# Altium PCB tPenAscii.PcbDoc
Units mm, origin at the board's own origin, x right, y up, seen from the top; angles counter-clockwise.
Board outline 48.77 x 80.39 mm, 2 copper layers (Top Layer, Bottom Layer); 69 components, 62 nets, 275 pads, 270 vias.
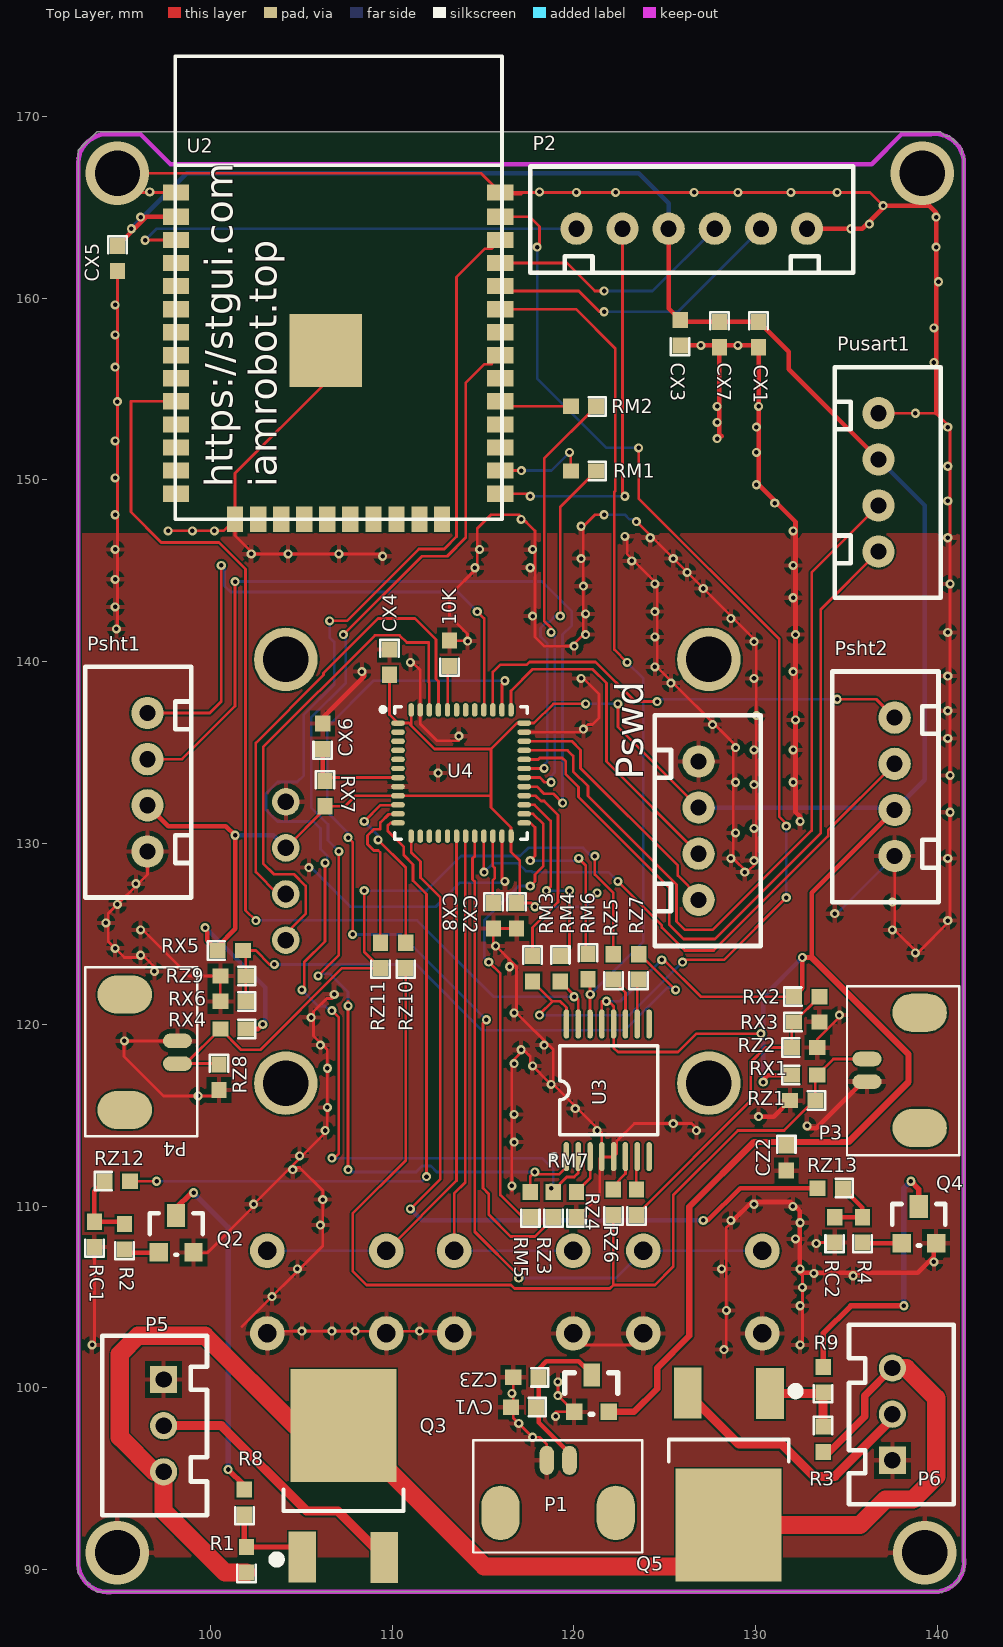
[diagram p0: Top Layer view]
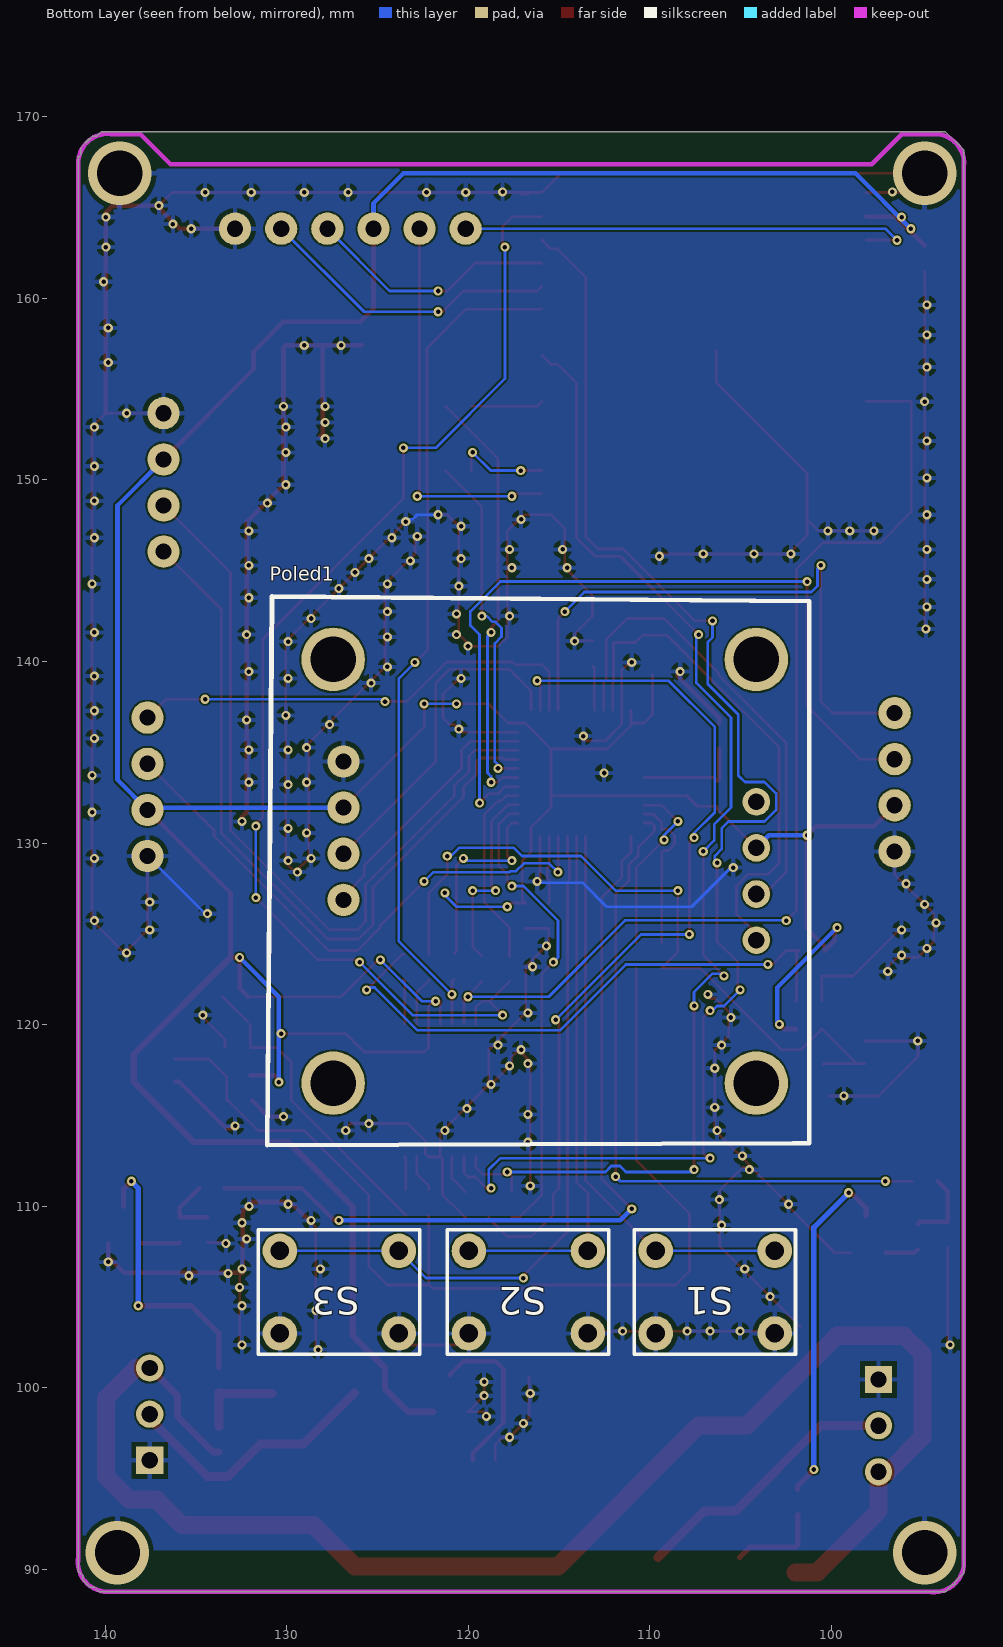
[diagram p1: Bottom Layer view, seen from below]

## Layer stack, top to bottom
Top Layer: signal copper 0.0356
Dielectric: dielectric 0.32, FR-4, Dk 4.8
Bottom Layer: signal copper 0.0356

## Board outline
92.71,90.297 92.71,168.021 92.71,168.148 93.726,169.164 95.25,169.164 140.208,169.164 140.335,169.037 140.462,168.91 140.589,168.91 140.716,168.91 140.843,168.783 141.351,168.275 141.351,168.021 141.351,167.894 141.478,167.767 141.478,90.424 141.478,89.916 141.351,89.789 141.224,89.662 141.224,89.408 140.843,89.027 140.589,89.027 140.335,88.773 135.509,88.773 94.107,88.773 93.726,88.773 93.599,88.9 93.345,89.154 93.218,89.154 93.218,89.281 92.964,89.535 92.71,89.789 92.71,90.297

## Design rules (kind name [scope] priority, off if disabled: settings)
Clearance [All] p1: gap=0.1
HoleToHoleClearance [All] p1: gap=0 allowstackedmicrovias=TRUE
MinimumSolderMaskSliver [All] p1: minsoldermaskwidth=0
PolygonConnect [All] p1: connectstyle=Relief reliefconductorwidth=0.254 reliefentries=4 polygonreliefangle="90 Angle" airgapwidth=0.254
RoutingVias [All] p1: holewidth=0.711 width=1.27 viastyle="Through Hole" minholewidth=0.711 minwidth=1.27 maxholewidth=0.711 maxwidth=1.27
SilkToSilkClearance [All] p1: silktosilkclearance=0
SilkToSolderMaskClearance [IsPad] p1: minsilkscreentomaskgap=0 clearancetoexposedcopper=TRUE
SolderMaskExpansion [All] p1: expansion=0.05
Width [All] p1: maxlimit=3 minlimit=0.1 preferedwidth=0.154 minimp=50.000000 maximp=50.000000 favimp=50.000000
24 further rules are at their usual default settings.

## Components (designator, comment, footprint, x,y, rotation, side; value= is the part's Value field where it differs from the comment)
1 "662K" SOT23-3-1 120.015,98.679 r0 top
10K "100" 0603 113.157,140.462 r90 top
CV1 "10uF" 0603 117.221,98.933 r180 top
CX1 "100NF" 0603 130.175,157.988 r270 top
CX2 "100NF" 0603 116.84,125.984 r270 top
CX3 "100NF" 0603 125.857,158.115 r90 top
CX4 "100NF" 0603 109.855,139.954 r270 top
CX5 "100NF" 0603 94.869,162.179 r270 top
CX6 "100NF" 0603 106.172,135.89 r90 top
CX7 "100NF" 0603 128.016,157.988 r270 top
CX8 "2.2UF" 0603 115.57,125.984 r270 top
CZ2 "105" 0603 131.699,112.649 r270 top
CZ3 "105" 0603 117.348,100.584 r180 top
P1 "1.25-2P" 1.25����-��ʽͨ��-2P 119.761,96.012 r180 top
P2 "插件座" B6B-XH-A 120.142,163.83 r0 top
P3 "1.25-2P" 1.25����-��ʽͨ��-2P 136.144,118.11 r270 top
P4 "1.25-2P" 1.25����-��ʽͨ��-2P 98.171,117.856 r90 top
P5 "3P接线端子" XH2.54-3 97.409,100.457 r270 top
P6 "3P接线端子" XH2.54-3 137.541,96.012 r90 top
Poled1 "插件座" 0.96OLED 114.554,126.746 r270 bottom
Psht1 "插件座" B4B-XH-A 96.52,129.54 r90 top
Psht2 "插件座" B4B-XH-A 137.668,129.286 r90 top
Pswd "插件座" B4B-XH-A 126.873,134.493 r270 top
Pusart1 "插件座" B4B-XH-A 136.779,153.67 r270 top
Q2 "NPN" SOT23 97.028,107.442 r0 top
Q3 "Pmos NTD25P03LG" TO252 107.315,93.726 r0 top
Q4 "NPN" SOT23 137.922,107.95 r0 top
Q5 "Pmos NTD25P03LG" TO252 128.524,96.647 r180 top
R1 "3K" 0603 101.981,90.551 r90 top
R2 "1K" 0603 95.25,108.331 r90 top
R3 "3K" 0603 133.731,97.155 r270 top
R4 "1K" 0603 135.89,108.712 r90 top
R8 "3K" 0603 101.854,93.726 r90 top
R9 "3K" 0603 133.731,100.457 r90 top
RC1 "10K" 0603 93.599,108.458 r90 top
RC2 "10K" 0603 134.366,108.712 r90 top
RM1 "100" 0603 120.523,150.495 r180 top
RM2 "100" 0603 120.523,154.051 r180 top
RM3 "100" 0603 117.729,123.063 r270 top
RM4 "100" 0603 119.253,123.063 r270 top
RM5 "100" 0603 117.602,110.109 r90 top
RM6 "100" 0603 120.777,123.19 r270 top
RM7 "100" 0603 118.872,110.109 r90 top
RX1 "6.8K" 0603 132.715,117.221 r0 top
RX2 "6.8K" 0603 132.842,121.539 r0 top
RX3 "330" 0603 132.842,120.142 r0 top
RX4 "6.8K" 0603 101.219,119.761 r180 top
RX5 "6.8K" 0603 101.092,124.079 r0 top
RX6 "330" 0603 101.219,121.285 r180 top
RX7 "10K" 0603 106.299,132.715 r270 top
RZ1 "10K" 0603 132.588,115.824 r180 top
RZ2 "10K" 0603 132.715,118.745 r0 top
RZ3 "10K" 0603 120.142,110.109 r90 top
RZ4 "1K" 0603 122.174,110.236 r90 top
RZ5 "1K" 0603 122.174,123.19 r90 top
RZ6 "1K" 0603 123.444,110.236 r90 top
RZ7 "1K" 0603 123.571,123.19 r90 top
RZ8 "10K" 0603 100.457,117.094 r270 top
RZ9 "10K" 0603 101.219,122.682 r180 top
RZ10 "1K" 0603 110.744,123.825 r90 top
RZ11 "1K" 0603 109.347,123.825 r90 top
RZ12 "1K" 0603 94.869,111.379 r0 top
RZ13 "1K" 0603 134.112,110.998 r180 top
S1 "开关" ��λ���� 105.41,105.537 r0 bottom
S2 "开关" ��λ���� 115.697,105.537 r0 bottom
S3 "开关" ��λ���� 126.111,105.537 r0 bottom
U2 "esp-wroom-32" ESP32 102.108,151.638 r0 top
U3 "ADS1220" SSOP16 123.317,116.586 r90 top
U4 "STM32F401CC" STM32F401CC-UFQFPN48 113.792,133.858 r0 top

## Footprints (in the part's own frame and the unit in brackets; to place one, negate y for a bottom-side part, rotate by r counter-clockwise, add the part's x,y. Pads: shape width x height; smd on the part's side, far side on the other; paste and mask are expansions set on the pad)
0.96OLED [mil]
  round 137.8 hole 98.43 mask+4: 01(-526.26,410) 02(392.4,410) 03(392.4,-507.32) 04(-526.26,-507.32)
  round 60 hole 36 mask+4: 1(-217.6,410) 2(-117.6,410) 3(-17.6,410) 4(82.4,410)
  silkscreen extent -663,-650 527,525
1.25����-��ʽͨ��-2P [mm]
  oval 2.1x3 smd: 0(-2.55,2.9) 0(3.8,2.9)
  oval 0.8x1.6 smd: 1(0,0) 2(1.25,0)
  round 1.524 on Top Overlay: 10(-2.096,0.066)
  silkscreen extent -4,-1.1 5.3,5.08
0603 [mil]
  rect 35x33 smd: 1(-28,0) 2(27,0)
  silkscreen extent -49,-20 -12,20
B4B-XH-A [mil]
  round 70 hole 35: 1(0,0) 2(100,0) 3(200,0) 4(300,0)
  silkscreen extent -100,-95 400,135, body extent -94,-93 394,134, height 276
B6B-XH-A [mil]
  round 70 hole 35: 1(0,0) 2(100,0) 3(200,0) 4(300,0) 5(400,0) 6(500,0)
  silkscreen extent -100,-95 600,135, body extent -93,-93 593,134, height 276
ESP32 [mil]
  rect 57x35.43 smd: 1(-158,558.66) 2(-158,505.72) 3(-158,455.72) 4(-158,405.72) 5(-158,355.72) 6(-158,305.72) 7(-158,255.72) 8(-158,205.72) 9(-158,155.72) 10(-158,105.72) 11(-158,55.72) 12(-158,5.72) 13(-158,-44.28) 14(-158,-94.28) 25(545,-94.28) 26(545,-44.28) 27(545,5.72) 28(545,55.72) 29(545,105.72) 30(545,155.72) 31(545,205.72) 32(545,255.72) 33(545,305.72) 34(545,355.72) 35(545,405.72) 36(545,455.72) 37(545,505.72) 38(545,558.66)
  rect 35.43x55 smd: 15(-30.08,-150) 16(19.92,-150) 17(69.92,-150) 18(119.92,-150) 19(169.92,-150) 20(219.92,-150) 21(269.92,-150) 22(319.92,-150) 23(369.92,-150) 24(418.74,-150)
  rect 157.48x157.48 smd: 39(166.77,216.14)
  silkscreen extent -160,-150 549,854
SOT23 [mil]
  rect 40x40 smd: 1(4.88,0.63) 3(79.88,0.63)
  rect 40x50 smd: 2(41.88,80.63)
  silkscreen extent -15,-4 100,86, body extent -15,-11 99,99, height 47
SOT23-3-1 [mil]
  rect 36x36 smd: 1(75,0) 2(0,0)
  rect 36x50 smd: 3(38,80)
  silkscreen extent -20,-5 95,85
SSOP16 [mm]
  oval 1.6x0.3 smd: 1(-3.85,3.725) 2(-3.85,3.075) 3(-3.85,2.425) 4(-3.85,1.775) 5(-3.85,1.125) 6(-3.85,0.475) 7(-3.85,-0.175) 8(-3.85,-0.825) 9(3.45,-0.825) 10(3.45,-0.175) 11(3.45,0.475) 12(3.45,1.125) 13(3.45,1.775) 14(3.45,2.425) 15(3.45,3.075) 16(3.45,3.725)
  silkscreen extent -3.97,-1.3 2.25,4.55, body extent -2.65,-1.2 2.25,4.1, height 1.1
STM32F401CC-UFQFPN48 [mm] "QFN, 48-Leads, Body 7.00x7.00mm, Pitch 0.50mm, IPC Medium Density"
  oval 0.75x0.3 smd: 1(-3.475,2.75) 2(-3.475,2.25) 3(-3.475,1.75) 4(-3.475,1.25) 5(-3.475,0.75) 6(-3.475,0.25) 7(-3.475,-0.25) 8(-3.475,-0.75) 9(-3.475,-1.25) 10(-3.475,-1.75) 11(-3.475,-2.25) 12(-3.475,-2.75) 25(3.475,-2.75) 26(3.475,-2.25) 27(3.475,-1.75) 28(3.475,-1.25) 29(3.475,-0.75) 30(3.475,-0.25) 31(3.475,0.25) 32(3.475,0.75) 33(3.475,1.25) 34(3.475,1.75) 35(3.475,2.25) 36(3.475,2.75)
  oval 0.3x0.75 smd: 13(-2.75,-3.475) 14(-2.25,-3.475) 15(-1.75,-3.475) 16(-1.25,-3.475) 17(-0.75,-3.475) 18(-0.25,-3.475) 19(0.25,-3.475) 20(0.75,-3.475) 21(1.25,-3.475) 22(1.75,-3.475) 23(2.25,-3.475) 24(2.75,-3.475) 37(2.75,3.475) 38(2.25,3.475) 39(1.75,3.475) 40(1.25,3.475) 41(0.75,3.475) 42(0.25,3.475) 43(-0.25,3.475) 44(-0.75,3.475) 45(-1.25,3.475) 46(-1.75,3.475) 47(-2.25,3.475) 48(-2.75,3.475)
  silkscreen extent -4.42,-3.65 3.65,3.65, body extent -3.51,-3.51 3.51,3.51, height 0.78
TO252 [mil] "252�����"
  rect 60x110 smd: 1(-89.55,-119.77) 3(88.45,-120.77)
  rect 230x245 smd: 2(0,165.35)
  silkscreen extent -153,-133 130,28, body extent -128,-120 128,251, height 91
XH2.54-3 [mm]
  rect 1.5x1.5 hole 0.9: 1(0,0)
  round 1.5 hole 0.9: 2(2.54,0) 3(5.08,0)
  silkscreen extent -2.41,-3.38 7.47,2.39, body extent -2.41,-3.41 7.49,2.34, height 7
��λ���� [mil]
  round 75 hole 40: 1(-90,100) 1(168,100) 2(-90,-79) 2(168,-79)
  silkscreen extent -135,-125 215,145, body extent -117,-112 195,132, height 276

## Part data
1: library part MH5330
10K R2 R4 R8 R9 RC1 RC2 RM1 RM2 RM3 RM4 RM5 RM6 RM7 RX1 RX2 RX3 RX4 RX5 RX6 RX7 RZ1 RZ2 RZ3 RZ4 RZ5 RZ6 RZ7 RZ8 RZ9 RZ10 RZ11 RZ12 RZ13: library part RES2
CV1: library part "Cap Pol1", "Polarized Capacitor (Radial)"
CX1 CX2 CX3 CX4 CX5 CX6 CX7 CX8 CZ2 CZ3: library part 104, "Capacitor"
P1 P3 P4: library part "Header 2", "Header, 2-Pin"
P2: library part �Ӳ����6P
P5 P6: library part 3P���߶���
Poled1 Psht1 Psht2 Pswd Pusart1: library part �Ӳ����4P
Q3 Q5: library part "MOSFET P"
R1 R3: library part RES
S1 S2 S3: library part �ᴥ����

## Via types
v1: diameter 0.5, hole 0.25, Top Layer to Bottom Layer, 266 vias
v2: diameter 3.5, hole 2.5, Top Layer to Bottom Layer, 4 vias

## Nets (pads, with @x,y where several pads share a name; then routed paths per layer and width w, separated by ;. In a path a pad name is that pad's centre, name@x,y a point inside that pad or via, vN(x,y) a via of type N, cw(c..) or ccw(c..) an arc to the next point about the centre after c; other vN are vias at no path point)
3V3: 1.1 CX1.1 CX2.1 CX3.2 CX4.2 CX5.1 CX7.1 CZ2.1 P2.3 Poled1.2 Psht1.2 Psht2.2 Pswd.2 Pusart1.2 RX1.1 RX2.1 RX4.1 RX5.1 RX7.2 U2.2 U3.12 U3.13 U4.1 U4.9 U4.24 U4.36 U4.48 | length 249.1
  Top Layer w0.15: Poled1.2 106.299,131.892 RX7.2 107.391,132.029 107.97,132.608 U4.9 115.423,132.608 115.443,132.588 ; CX4.2 109.855,137.07 U4.1 110.915,136.608 111.042,136.481 ; U4.48 111.042,136.481 ; v1@117.729,126.619 117.653,126.695 CX2.1 117.023,126.878 117.023,129.032 116.542,129.513 U4.24 116.542,130.854 115.443,131.953 115.443,132.588 ; v1(120.65,137.668) 118.872,137.668 117.812,136.608 U4.36 116.865,136.608 115.443,135.186 ; U3.13 121.542,121.288 ; v1(121.796,121.288) 121.923,121.288 122.053,121.158 122.047,121.158 122.192,121.013 U3.12 122.192,118.727 122.428,118.491 125.73,118.491 126.746,119.507 v1@130.429,119.507 ; v1(122.428,137.668) 122.428,136.398 Pswd.2 ; v1(124.841,123.571) 124.968,123.571 127,121.539 RX2.1 ; 111.042,136.481 112.337,135.186 115.443,135.186 ; 115.443,132.588 115.443,135.186
  Top Layer w0.253: CX5.1 96.462,164.483 U2.2 ; Psht1.2 97.663,130.937 100.838,130.937 v1(101.346,130.429) 101.346,125.272 100.381,124.307 RX5.1 99.822,124.638 99.822,125.095 ; RX4.1 102.616,119.761 v1(102.87,120.015) ; P2.3 125.222,159.436 CX3.2 125.959,158.699 CX7.1 CX1.1 130.18,158.699 131.826,157.053 131.826,156.083 Pusart1.2
  Top Layer w0.254: v1@130.429,116.967 130.683,117.221 RX1.1 ; RX2.1 132.588,121.996 132.588,123.444 ; v1(132.588,123.698) 133.096,123.698 133.096,127.254 Psht2.2
  Top Layer w0.35: 1.1 123.317,98.679 124.587,99.949 124.587,101.092 126.365,102.87 126.365,109.982 129.921,113.538 135.128,113.538 138.43,116.84 138.43,118.364 133.096,123.698
  Bottom Layer w0.15: v1(117.856,126.492) 120.65,126.492 v1@121.285,127.127 ; v1@120.777,137.668 v1(122.428,137.668) ; v1(121.796,121.288) 122.555,121.288 124.838,123.571 v1(124.841,123.571)
  Bottom Layer w0.253: v1(95.631,163.83) 98.68,166.879 123.57,166.879 125.222,165.227 P2.3 ; v1(99.695,125.349) 102.997,122.047 v1@102.997,120.142 ; v1(101.346,130.429) 103.444,130.429 Poled1.2
  Bottom Layer w0.254: Pswd.2 137.541,131.953 Psht2.2 139.319,133.477 139.319,148.59 Pusart1.2 ; v1(130.429,116.84) 130.429,121.539 v1(132.588,123.698)
  other v1: 130.302,119.507 121.285,127.254 96.139,164.465
24V: P5.3 P6.3 Q3.2 Q5.2 R1.1 R3.2 | length 82.4
  Top Layer w0.4: R3.2 134.061,96.469 136.017,98.425 136.017,99.568 P6.3
  Top Layer w1: R1.1 100.787,89.84 97.409,93.218 P5.3 96.901,95.377 94.996,97.282 94.996,101.854 96.012,102.87 99.695,102.87 104.639,97.926 Q3.2 115.071,90.17 126.247,90.17 Q5.2 135.754,92.447 137.16,93.853 138.684,93.853 139.954,95.123 139.954,99.441 138.303,101.092 P6.3
24VOUT1: P5.2 Q3.3 | length 15.2
  Top Layer w0.5: P5.2 100.584,97.917 105.283,93.218 107.002,93.218 Q3.3
24VOUT2: P6.2 Q5.3 | length 14.7
  Top Layer w0.5: Q5.3 129.091,96.901 131.445,96.901 133.223,95.123 134.366,95.123 137.541,98.298 P6.2
ADS_DI: RM3.2 U2.37 U3.16 | length 66.4
  Top Layer w0.15: U2.37 117.584,164.483 118.11,163.957 v1@118.11,162.814 ; RM3.2 118.821,121.285 ; v1(118.11,120.523) 118.11,120.574 118.821,121.285 ; U3.16 119.592,120.946 119.253,121.285 118.821,121.285 ; v1(123.571,151.765) 123.571,148.971 131.318,141.224 131.318,131.445 v1@131.762,131 ; v1@125.984,123.571 128.27,123.571 v1(131.699,127)
  Bottom Layer w0.15: v1(117.983,162.814) 117.983,155.575 121.793,151.765 123.317,151.765 ; v1(118.11,120.523) 123.063,120.523 v1(125.984,123.444) ; v1(131.699,127) v1(131.699,130.937)
ADS_OUT: RM4.2 U2.10 U3.15 | length 57.8
  Top Layer w0.15: U2.10 95.613,154.323 95.613,148.227 97.282,146.558 100.457,146.558 101.925,145.09 101.925,126.294 v1(102.489,125.73) ; RM4.2 120.242,121.388 U3.15
  Bottom Layer w0.15: v1(102.489,125.73) 102.503,125.744 111.365,125.744 115.57,121.539 v1(120.015,121.539)
ADS_RST: U2.30
BAT: 1.3 CV1.1 CZ3.1 P1.1 | length 9.2
  Top Layer w0.254: P1.1 119.761,96.393 118.059,98.095 CZ3.1 118.059,101.041 118.491,101.473 120.269,101.473 120.98,100.762 1.3
CLK: RM5.2 U2.31 U3.1 | length 66.6
  Top Layer w0.15: v1(105.918,122.682) 107.061,123.825 v1(107.061,129.54) ; v1(107.315,141.478) 111.633,145.796 113.03,145.796 114.046,146.812 114.046,155.327 115.091,156.372 115.46,156.372 U2.31 ; v1(107.569,112.014) 107.569,121.285 ; RM5.2 117.602,111.633 v1(117.856,111.887) ; v1@117.983,111.76 119.19,111.76 119.592,112.162 U3.1
  Bottom Layer w0.15: v1@106.045,122.809 106.553,122.809 107.569,121.793 v1(107.569,121.031) ; v1(107.061,129.54) 106.458,130.143 106.458,131.032 105.537,131.953 105.537,136.906 107.442,138.811 v1@107.442,141.478 ; v1@107.696,111.887 111.322,111.887 111.647,112.212 112.127,112.212 112.452,111.887 v1(117.856,111.887)
CS: RM7.2 U2.36 U3.2 | length 78.6
  Top Layer w0.15: v1@105.156,121.92 105.156,123.444 106.299,124.587 v1(106.299,128.905) ; v1(106.68,120.777) 107.061,120.396 107.061,112.903 v1@106.807,112.649 ; v1@106.68,142.24 107.506,142.24 111.466,146.2 112.863,146.2 113.538,146.875 113.538,161.169 115.091,162.722 115.46,162.722 U2.36 ; RM7.2 118.872,110.871 119.608,111.607 120.017,111.607 120.242,111.832 U3.2
  Bottom Layer w0.15: v1(105.029,121.92) 105.918,121.031 106.299,121.031 v1@106.553,120.777 ; v1@106.426,128.905 106.426,129.286 106.045,129.667 106.045,130.81 105.673,131.182 103.688,131.182 103.049,131.821 103.049,132.725 103.688,133.364 104.766,133.364 105.133,133.731 105.133,137.073 106.807,138.747 106.807,141.074 106.553,141.328 v1(106.553,142.24) ; v1(106.68,112.649) 118.237,112.649 118.872,112.014 v1@118.872,110.998
  other v1: 118.745,110.998
ESP32EN: P2.1 U2.3 | length 25.7
  Top Layer w0.15: v1@96.411,163.213 U2.3
  Bottom Layer w0.15: v1(96.393,163.195) 97.028,163.83 P2.1
ESP32IO0: P2.2 U2.25 | length 21.5
  Top Layer w0.15: U2.25 v1@117.457,149.243 ; P2.2 122.682,149.225 v1(122.809,149.098)
  Bottom Layer w0.15: v1(117.602,149.098) v1(122.809,149.098)
"ESP32RX MCUTX": RM2.2 U2.29 | length 4
  Top Layer w0.15: U2.29 116.223,154.051 RM2.2
"ESP32TX MCURX": RM1.2 U2.26 | length 5.3
  Top Layer w0.15: U2.26 v1(117.112,150.513) v1@117.221,150.622 ; RM1.2 v1@119.837,151.435
  Bottom Layer w0.15: v1(117.112,150.513) 118.763,150.513 v1(119.761,151.511)
GND: 1.2 10K.2 CV1.2 CX1.2 CX2.2 CX3.1 CX4.1 CX5.2 CX6.2 CX7.2 CX8.2 CZ2.2 CZ3.2 P1.2 P2.6 P3.2 P4.2 P5.1 P6.1 Poled1.1 Psht1.1 Psht2.1 Pswd.1 Pusart1.1 Q2.3 Q4.3 RC1.1 RC2.1 RX3.2 RX6.2 RZ1.2 RZ2.2 RZ3.1 RZ8.2 RZ9.2 S1.1 S2.1 S3.1 U2.1 U2.15 U2.38 U2.39 U3.4 U3.5 U4.8 U4.23 U4.35 U4.47 | length 457
  Top Layer w0.15: v1@93.599,102.362 RC1.1 ; CX5.2 94.869,141.859 v1@94.996,141.732 ; v1@96.139,125.349 98.806,122.682 RZ9.2 RX6.2 ; Psht1.1 96.52,128.27 94.361,126.111 94.361,124.587 95.25,123.698 96.393,123.698 97.028,123.063 v1@97.028,122.936 ; v1@97.536,147.193 100.709,147.193 U2.15 ; U2.1 95.919,165.828 v2(94.869,166.878) 114.901,166.878 U2.38 136.305,165.828 v1(137.033,165.1) ; P4.2 95.23,119.106 95.23,118.257 97.409,116.078 RZ8.2@100.127,116.078 ; Q2.3@98.933,107.442 99.822,107.442 v1@102.425,110.045 ; 101.727,103.378 106.172,107.823 106.172,110.871 104.902,112.141 104.775,112.141 ; v1(102.362,110.109) 106.426,114.173 106.426,118.618 105.664,119.38 105.664,120.714 106.394,121.444 106.712,121.444 v1@106.934,121.666 ; S1.1@103.124,102.997 103.251,103.124 S2.1@114.122,103.124 ; U2.39 106.344,155.366 101.344,150.366 U2.15 ; v1@109.601,145.796 109.474,145.923 102.362,145.923 101.344,146.941 U2.15 ; v1@111.125,139.954 111.542,139.537 U4.47 111.542,136.552 112.458,135.636 113.665,135.636 ; 10K.2 v1@114.148,141.148 ; v1(114.148,141.122) v1@114.148,141.148 ; U4.23 116.045,130.38 116.045,127.922 v1@116.078,127.889 ; 116.586,110.871 116.586,117.983 117.221,118.618 117.602,118.237 117.602,117.856 v1(118.745,116.713) ; CZ3.2 116.662,98.349 v1(117.729,97.282) 118.11,97.282 118.511,96.881 P1.2 ; 116.713,165.735 117.094,165.735 ; CX2.2 CX8.2 115.57,124.46 116.84,123.19 116.84,120.65 118.872,118.618 118.872,116.713 121.542,114.043 U3.4 ; U4.35 120.36,136.108 120.777,136.525 121.031,136.525 121.389,136.883 121.389,138.199 v1@120.523,139.065 ; v1@118.999,98.298 118.999,98.679 1.2 v1(119.126,99.568) v1(119.126,100.33) ; S2.1@119.964,102.362 123.19,102.362 S3.1@123.825,102.997 ; RZ3.1 120.193,109.398 121.426,110.631 121.426,112.62 U3.4 ; v1@121.793,148.082 v1(121.666,148.082) 121.158,148.082 120.523,147.447 120.523,141.478 119.888,140.843 118.364,140.843 117.856,141.351 117.856,147.193 116.967,148.082 115.443,148.082 114.681,147.32 114.681,145.161 113.157,143.637 113.157,142.494 114.148,141.503 v1@114.148,141.148 ; v1@122.809,146.939 122.888,146.939 122.936,146.891 122.936,145.923 124.587,144.272 124.587,139.7 128.778,135.509 128.778,129.159 129.54,128.397 130.048,128.905 130.048,141.097 v1(123.444,147.701) ; v1@126.873,114.173 126.492,114.554 123.333,114.554 122.363,113.584 122.363,112.907 U3.5 122.174,112.718 121.56,112.718 U3.4 ; v1@128.397,102.108 128.397,108.839 v1@128.778,109.22 ; v1@132.43,106.33 132.588,106.172 v1@132.588,102.362 ; v1(133.35,107.95) 133.401,108.001 RC2.1 ; RZ2.2 133.401,119.177 v1@134.747,120.523 ; Pusart1.1 v1(138.811,153.67) 139.954,153.67 140.716,152.908 140.716,125.73 138.938,123.952 137.668,125.222 Psht2.1
  Top Layer w0.254: CX6.2 106.172,136.906 108.458,139.192 v1@108.458,139.446 ; CX3.1 130.073,157.404 CX1.2 130.175,149.733 132.207,147.701 132.207,131.699 132.461,131.445 ; CX7.2 128.016,152.527 128.143,152.4 ; v1@128.778,109.22 129.794,110.236 131.953,110.236 132.43,109.759 132.43,106.33 138.938,106.33 139.827,107.219 Q4.3@139.827,107.95 ; v1@130.302,114.935 131.013,114.935 RZ1.2 ; v1@132.842,114.3 133.35,114.3 135.91,116.86 P3.2 ; P2.6 135.89,163.83 137.16,165.1 139.573,165.1 139.954,164.719 139.954,153.67
  Bottom Layer w0.15: v1@105.41,128.778 107.696,126.492 112.395,126.492 113.721,127.818 116.134,127.818 v1(116.205,127.889) ; v1(121.666,148.082) 122.809,148.082 123.063,147.828 v1@123.571,147.828 ; v1@134.493,126.111 Psht2.1
  other v1: 116.967,98.044 118.999,98.425 116.586,99.695 128.27,102.108 93.472,102.362 132.461,102.362 105.029,103.124 106.68,103.124 107.95,103.124 111.506,103.124 128.397,104.267 132.461,104.521 103.378,105.029 132.588,105.537 135.382,106.172 133.223,106.299 104.775,106.553 128.143,106.553 132.461,106.553 139.827,106.934 132.207,108.204 106.045,108.966 132.461,109.093 128.651,109.22 132.065,109.997 129.921,110.109 106.172,110.363 116.586,111.125 104.521,112.014 104.902,112.776 116.713,113.538 106.299,114.173 121.285,114.173 126.746,114.173 132.842,114.427 125.476,114.554 130.175,114.935 116.713,115.062 120.08,115.378 106.426,115.443 99.314,116.078 106.426,117.602 117.729,117.729 116.713,117.856 117.094,118.618 106.045,118.872 118.364,118.872 95.25,119.106 105.537,120.396 134.62,120.523 116.713,120.65 106.807,121.666 96.901,122.936 116.459,123.19 96.139,123.825 138.811,123.952 94.742,124.206 115.697,124.333 96.139,125.222 137.541,125.222 94.234,125.603 140.589,125.73 134.366,126.111 94.869,126.619 137.541,126.746 95.885,127.762 129.413,128.397 105.41,128.651 129.921,129.032 128.651,129.159 140.589,129.159 128.905,130.556 129.921,130.81 132.461,131.191 140.716,131.699 129.921,133.223 128.905,133.35 132.08,133.35 140.716,133.731 112.522,133.858 129.921,135.128 132.08,135.128 128.905,135.255 140.589,135.763 113.665,135.89 120.523,136.271 127.635,136.525 132.207,136.779 130.048,137.033 140.589,137.287 125.349,138.811 120.396,139.065 129.921,139.065 140.589,139.192 108.331,139.446 132.08,139.446 124.46,139.7 110.998,139.954 120.015,140.843 129.921,141.097 124.46,141.351 120.65,141.478 132.207,141.478 140.589,141.605 94.805,141.796 128.651,142.367 117.729,142.494 120.65,142.621 124.46,142.748 94.742,143.002 132.08,143.51 127.127,144.018 120.523,144.145 124.46,144.272 140.716,144.272 94.742,144.526 126.238,144.907 114.554,145.161 117.602,145.161 132.08,145.288 123.19,145.542 120.396,145.669 125.476,145.669 109.474,145.796 102.235,145.923 104.267,145.923 107.061,145.923 94.742,146.177 114.808,146.177 117.729,146.177 124.206,146.812 140.589,146.812 122.809,146.891 97.663,147.193 98.996,147.193 100.203,147.193 132.08,147.193 120.396,147.447 117.094,147.828 94.742,148.082 131.064,148.717 140.589,148.844 130.048,149.733 94.742,150.114 140.589,150.749 130.048,151.511 94.742,152.146 127.889,152.273 130.048,152.908 140.589,152.908 127.889,153.162 127.889,154.051 130.175,154.051 94.869,154.305 94.742,156.21 139.827,156.464 127,157.404 129.032,157.404 94.742,157.988 139.827,158.369 94.742,159.639 140.081,160.909 139.954,162.814 135.255,163.83 136.271,164.084 139.954,164.465 120.142,165.828 122.301,165.828 126.619,165.828 129.032,165.828 131.953,165.828 134.493,165.828 96.647,165.862 118.11,165.862
  other v2: 94.869,90.932 139.319,90.932 139.192,166.878
K1: S1.2 U4.18 | length 31
  Top Layer w0.15: S1.2@109.677,107.544 113.542,111.408 U4.18
  Bottom Layer w0.15: S1.2@103.124,107.544 S1.2@109.677,107.544
K2: S2.2 U4.19 | length 29.7
  Top Layer w0.15: S2.2@113.411,107.544 113.411,110.706 114.021,111.316 114.021,130.362 U4.19
  Bottom Layer w0.15: S2.2@113.411,107.544 S2.2@119.964,107.544
K3: S3.2 U4.20 | length 39.5
  Top Layer w0.15: U4.20 114.542,129.276 114.425,129.159 114.425,128.006 114.542,127.889 114.542,108.597 v1@117.094,106.045
  Bottom Layer w0.15: v1(116.967,106.045) 122.326,106.045 123.825,107.544 S3.2@130.378,107.544
Net10K_1: 10K.1 U4.44 | length 2.5
  Top Layer w0.15: U4.44 113.063,137.354 113.063,139.657 10K.1
NetCX6_1: CX6.1 RX7.1 U4.7 | length 5.9
  Top Layer w0.15: RX7.1 106.481,133.608 U4.7
  Top Layer w0.254: CX6.1 106.172,133.553 RX7.1
NetCX8_1: CX8.1 U4.22 | length 3.8
  Top Layer w0.15: U4.22 115.542,128.736 115.641,128.637 115.641,128.058 115.542,127.959 115.542,126.723 CX8.1
NetP2_4: P2.4 U2.35 | length 13.9
  Top Layer w0.15: U2.35 119.616,161.943 121.158,160.401 v1(121.666,160.401)
  Bottom Layer w0.15: v1(121.666,160.401) 124.333,160.401 P2.4
NetP2_5: P2.5 U2.34 | length 16.8
  Top Layer w0.15: U2.34 116.223,160.401 120.269,160.401 121.412,159.258 v1(121.666,159.258)
  Bottom Layer w0.15: v1(121.666,159.258) 125.73,159.258 P2.5
NetP3_1: P3.1 RX1.2 RZ1.1 RZ4.1 RZ10.1 | length 58.7
  Top Layer w0.15: RZ10.1 110.744,112.522 107.823,109.601 107.823,106.426 108.585,105.664 116.529,105.664 116.727,105.466 121.976,105.466 122.174,105.664 ; RZ4.1@122.174,109.466 122.174,105.664 ; P3.1 134.29,118.11 RX1.2 133.299,117.119 RZ1.1 133.231,115.824 131.58,114.173 129.032,114.173 125.476,110.617 125.476,106.68 124.46,105.664 122.174,105.664
NetP4_1: P4.1 RX4.2 RZ5.2 RZ8.1 RZ11.1 | length 40.4
  Top Layer w0.15: P4.1 P4.1@98.628,117.856 ; RZ8.1 100.406,117.856 P4.1@98.628,117.856 ; v1@108.458,127.254 108.458,124.003 RZ11.1 107.239,123.114 102.743,118.618 101.676,118.618 RX4.2 P4.1@98.628,117.856 ; v1@108.521,127.317 v1@108.585,127.381 ; v1(121.158,129.286) 121.158,128.27 122.174,127.254 RZ5.2
  Bottom Layer w0.15: v1(108.458,127.381) 111.887,127.381 113.792,129.286 117.037,129.286 117.489,129.738 120.509,129.738 120.961,129.286 v1(121.158,129.286)
NetQ2_1: Q2.1 R2.1 | length 1.9
  Top Layer w0.254: R2.1 95.428,107.442 Q2.1@97.028,107.442
NetQ2_2: Q2.2 R8.2 | length 19.2
  Top Layer w0.3: Q2.2 98.092,109.903 98.933,110.744 v1(99.06,110.744) ; v1(100.965,95.504) 101.854,94.615 R8.2
  Bottom Layer w0.3: v1(99.06,110.744) 100.965,108.839 v1(100.965,95.504)
NetQ3_1: Q3.1 R1.2 R8.1 | length 5.1
  Top Layer w0.3: R8.1 101.854,91.364 R1.2 104.487,91.237 Q3.1
NetQ4_1: Q4.1 R4.1 | length 2.2
  Top Layer w0.254: R4.1 135.925,107.966 Q4.1
NetQ4_2: Q4.2 R9.2 | length 15.5
  Top Layer w0.3: R9.2 133.731,102.997 135.255,104.521 v1(138.176,104.521) ; v1(138.557,111.379) 138.986,110.95 Q4.2
  Bottom Layer w0.3: v1(138.176,104.521) 138.176,110.998 v1(138.557,111.379)
NetQ5_1: Q5.1 R3.1 R9.1 | length 4.8
  Top Layer w0.5: Q5.1 133.674,99.689 R9.1 R3.1
NetR2_2: R2.2 RC1.2 RZ12.1 | length 4.2
  Top Layer w0.254: RZ12.1 93.599,110.82 RC1.2 95.123,109.144 R2.2
NetR4_2: R4.2 RC2.2 RZ13.1 | length 3.6
  Top Layer w0.254: RC2.2 R4.2 135.89,109.931 RZ13.1
NetRM1_1: RM1.1 U4.31 | length 19
  Top Layer w0.15: U4.31 118.106,134.108 118.11,134.112 ; v1(119.253,142.494) 119.253,148.514 RM1.1
  Bottom Layer w0.15: v1(118.364,134.112) 118.364,134.318 118.539,134.493 118.539,140.992 118.166,141.365 118.166,141.845 118.505,142.184 118.666,142.184 118.976,142.494 v1(119.253,142.494)
NetRM2_1: RM2.1 U4.30 | length 23.8
  Top Layer w0.15: U4.30 118.129,133.608 118.387,133.35 v1(118.745,133.35) ; v1(118.745,141.605) 118.745,141.859 118.364,142.24 118.364,151.181 RM2.1
  Bottom Layer w0.15: v1(118.745,133.35) 118.745,133.674 118.943,133.872 118.943,141.407 v1(118.745,141.605)
NetRM3_1: RM3.1 U4.28 | length 10.7
  Top Layer w0.15: U4.28 117.9,132.608 118.197,132.311 118.364,132.311 119.126,131.549 119.126,126.746 117.729,125.349 RM3.1
NetRM4_1: RM4.1 U4.27 | length 10.8
  Top Layer w0.15: U4.27 117.828,132.108 118.722,131.214 118.722,127.612 v1(118.491,127.381) ; RM4.1 119.761,124.282 v1(119.761,127.381)
  Bottom Layer w0.15: v1(118.491,127.381) v1(119.761,127.381)
NetRM5_1: RM5.1 U4.26 | length 26
  Top Layer w0.15: v1(115.316,123.444) 115.951,122.809 115.951,110.617 117.17,109.398 RM5.1 ; U4.26 117.757,131.608 118.318,131.047 118.318,128.732 117.856,128.27 117.856,127.889 v1(117.602,127.635)
  Bottom Layer w0.15: v1(115.316,123.444) 115.062,123.698 115.062,125.73 116.967,127.635 v1(117.602,127.635)
NetRM6_1: RM6.1 U4.25 | length 10.8
  Top Layer w0.15: U4.25 117.616,131.108 117.856,130.868 117.856,129.286 117.729,129.159 v1@117.475,129.159 ; v1(120.269,129.159) 120.65,128.778 120.65,124.028 RM6.1
  Bottom Layer w0.15: v1(117.602,129.032) 120.015,129.032 v1@120.142,129.159
NetRM7_1: RM7.1 U4.38 | length 49
  Top Layer w0.15: v1(107.569,130.302) 107.823,130.048 v1(107.823,124.968) ; v1(115.189,120.269) 114.999,120.079 114.999,110.998 115.316,110.681 115.316,109.538 116.523,108.331 117.864,108.331 118.872,109.339 RM7.1 ; U4.38 116.042,138.775 v1(116.205,138.938)
  Bottom Layer w0.15: 107.569,130.556 106.426,131.699 106.426,136.398 108.966,138.938 v1(116.205,138.938) ; v1(107.823,124.968) 110.49,124.968 v1(115.189,120.269)
NetRX2_2: RX2.2 RX3.1 RZ2.1 RZ6.1 | length 16.9
  Top Layer w0.15: RZ6.1 129.743,115.824 129.743,117.932 130.556,118.745 RZ2.1 RX3.1@132.004,120.015 ; RX3.1 RX2.2
NetRX5_2: RX5.2 RX6.1 RZ7.2 RZ9.1 | length 32.2
  Top Layer w0.15: RX6.1 RZ9.1 101.93,123.927 RX5.2 102.489,124.079 103.251,123.317 v1@103.378,123.317 ; RZ7.2 123.647,123.876 v1(125.603,121.92)
  Bottom Layer w0.15: v1(103.505,123.317) 111.322,123.317 114.949,119.69 122.801,119.69 125.158,122.047 v1@125.603,122.047
NetRZ3_2: RZ3.2 U3.3 | length 2.3
  Top Layer w0.15: RZ3.2 120.904,111.557 120.904,112.724 U3.3
NetRZ4_2: RZ4.2 U3.6 | length 2.1
  Top Layer w0.15: RZ4.2 122.174,111.125 122.842,111.793 U3.6
NetRZ5_1: RZ5.1 U3.11 | length 2.7
  Top Layer w0.15: RZ5.1 122.174,122.428 122.842,121.76 U3.11
NetRZ6_2: RZ6.2 U3.7 | length 1.8
  Top Layer w0.15: RZ6.2 123.444,112.688 U3.7
NetRZ7_1: RZ7.1 U3.10 | length 2.5
  Top Layer w0.15: U3.10 123.492,122.4 RZ7.1
NetRZ10_2: RZ10.2 U4.10 | length 9.7
  Top Layer w0.15: v1(108.458,131.191) 109.354,132.087 110.296,132.087 U4.10 ; v1(109.22,130.175) 110.744,128.651 RZ10.2
  Bottom Layer w0.15: v1@108.585,131.064 109.22,130.429 v1(109.22,130.175)
NetRZ11_2: RZ11.2 U4.11 | length 8.7
  Top Layer w0.15: RZ11.2 109.347,129.477 109.228,129.596 108.98,129.596 108.641,129.935 108.641,130.415 108.98,130.754 109.347,130.754 109.347,131.127 109.807,131.587 110.296,131.587 U4.11
NetRZ12_2: RZ12.2 U4.12 | length 37.3
  Top Layer w0.15: RZ12.2 v1(97.028,111.379) ; U4.12 109.899,131.108 109.751,130.96 109.751,130.66 110.638,129.773 110.638,129.328 111.148,128.818 111.148,127.93 111.887,127.191 v1(111.887,111.633)
  Bottom Layer w0.15: v1(97.028,111.379) 111.633,111.379 v1(111.887,111.633)
NetRZ13_2: RZ13.2 U4.13 | length 45.1
  Top Layer w0.15: v1(110.998,109.855) 112.649,111.506 112.649,127 111.552,128.097 111.552,128.986 111.042,129.496 U4.13
  Top Layer w0.254: 127.381,109.22 129.159,110.998 RZ13.2
  Bottom Layer w0.254: v1(110.998,109.855) 111.633,109.22 v1(127.127,109.22)
PA8SCL: Psht1.3 U4.29 | length 45.4
  Top Layer w0.15: Psht1.3 98.425,134.62 101.346,137.541 v1(101.346,144.399) ; U4.29 117.971,133.108 118.364,132.715 118.872,132.715 v1(119.38,132.207)
  Bottom Layer w0.15: v1(101.346,144.399) 118.237,144.399 119.888,142.748 119.888,141.986 119.38,141.478 v1(119.38,132.207)
PA13SWIO: Pswd.4 U4.34 | length 14.2
  Top Layer w0.15: U4.34 119.888,135.608 120.368,135.128 120.368,134.12 125.73,128.758 125.73,128.206 126.873,127.063 Pswd.4
PA14SWCK: Pswd.3 U4.37 | length 18.6
  Top Layer w0.15: U4.37 116.542,138.386 117.729,139.573 121.031,139.573 121.793,138.811 121.793,134.493 Pswd.3
PB3SDA: Psht2.4 U4.39 | length 25.8
  Top Layer w0.15: U4.39 115.542,139.418 115.951,139.827 117.412,139.827 117.562,139.977 121.198,139.977 123.38,137.795 v1(124.587,137.795) ; v1(134.493,137.922) 136.652,137.922 Psht2.4
  Bottom Layer w0.15: v1(124.587,137.795) 124.714,137.922 v1(134.493,137.922)
PB4SDA: Psht1.4 U4.40 | length 32.9
  Top Layer w0.15: Psht1.4 99.949,137.16 100.584,137.795 100.584,145.034 ; v1(114.681,142.748) 115.062,142.367 115.062,137.353 U4.40
  Bottom Layer w0.15: v1(100.584,145.288) 100.767,145.105 100.767,144.159 101.106,143.82 113.609,143.82 v1(114.681,142.748)
PB8SCL: Poled1.3 U4.45 | length 26.5
  Top Layer w0.15: Poled1.3 103.693,127.193 102.489,128.397 102.489,135.522 106.219,139.252 106.219,139.366 109.22,142.367 111.252,142.367 112.409,141.21 112.409,139.037 112.542,138.904 U4.45
PB9SDA: Poled1.4 U4.46 | length 28.2
  Top Layer w0.15: Poled1.4 104.14,125.011 105.231,126.102 105.231,127.645 104.592,128.284 103.491,128.284 102.893,128.882 102.893,135.288 109.044,141.439 110.41,141.439 110.806,141.043 112.005,141.043 112.005,138.87 112.042,138.832 U4.46
PB10SCL: Psht2.3 U4.21 | length 31.3
  Top Layer w0.15: U4.21 115.042,128.417 v1(115.062,128.397) ; v1(122.428,127.889) 124.847,125.47 124.847,125.343 126.111,124.079 127.698,124.079 134.008,130.389 134.008,130.706 Psht2.3
  Bottom Layer w0.15: v1(115.062,128.397) 115.547,128.882 116.933,128.882 117.362,128.453 117.673,128.453 117.729,128.397 121.92,128.397 v1(122.428,127.889)
REDAY: RM6.2 U2.33 U3.14 | length 47.2
  Top Layer w0.15: U2.33 120.124,159.403 122.278,157.249 122.278,149.386 122.23,149.338 122.23,140.66 v1(122.936,139.954) ; RM6.2 120.892,122.389 U3.14
  Bottom Layer w0.15: v1(120.904,121.666) 123.825,124.587 123.825,126.422 123.825,139.065 v1(122.936,139.954)
U6RX: Pusart1.3 U4.33 | length 43.6
  Top Layer w0.15: U4.33 119.654,135.108 119.964,134.798 119.964,133.953 120.777,133.14 120.777,132.588 125.655,127.71 125.655,125.678 126.111,125.222 127.635,125.222 133.096,130.683 133.096,144.907 Pusart1.3
U6TX: Pusart1.4 U4.32 | length 41.7
  Top Layer w0.15: U4.32 118.041,134.608 118.124,134.691 119.362,134.691 119.56,134.493 119.56,133.786 120.259,133.086 120.259,132.534 125.251,127.543 125.251,125.511 126.048,124.714 127.762,124.714 133.604,130.556 133.604,142.875 Pusart1.4
pads on no net: P1.0 P1.10 P3.0 P3.10 P4.0 P4.10 Poled1.01 Poled1.02 Poled1.03 Poled1.04 U2.4 U2.5 U2.6 U2.7 U2.8 U2.9 U2.11 U2.12 U2.13 U2.14 U2.16 U2.17 U2.18 U2.19 U2.20 U2.21 U2.22 U2.23 U2.24 U2.27 U2.28 U2.32 U3.8 U3.9 U4.2 U4.3 U4.4 U4.5 U4.6 U4.14 U4.15 U4.16 U4.17 U4.41 U4.42 U4.43

## Polygon pours and split planes (outlines as drawn)
GND on Top Layer "Top Layer-No Net" (solid, remove dead copper, pour order 2): 92.583,147.066 141.351,147.066 141.351,91.05 141.351,90.678 92.71,90.678 92.71,147.066
GND on Bottom Layer "Top Layer-No Net" (solid, remove dead copper, pour order 4): 92.329,167.259 92.456,167.132 141.224,167.132 141.224,90.17 140.843,89.789 139.573,91.059 92.456,91.059 92.456,167.005 92.329,167.132

## Keep-outs
Keep-Out Layer:
  lines w0.254: 92.71,90.297 92.71,167.259 cw(c94.327,167.423) 94.503,169.039 96.137,169.039 97.79,167.386 116.078,167.386 136.398,167.386 138.061,169.049 139.689,169.049 cw(c139.853,167.432) 141.478,167.386 ; 92.71,90.424 ccw(c94.335,90.378) 94.499,88.761 ; 94.107,88.773 140.081,88.773 ; 139.827,88.773 ccw(c139.873,90.398) 141.49,90.562 ; 141.478,90.424 141.478,167.432

## Silkscreen, mask and mechanical layers (free items; w line width, h text height)
Top Overlay:
  text "https://stgui.com" at 101.219,149.606 h1.52 r90
  text "iamrobot.top" at 103.632,149.606 h1.52 r90